# EAGLE board ControlParqueadero (EAGLE 5.07)

Size 160 x 100 mm. Coordinates in mm from the lower left corner, seen from the top.
Outline: 0,0 160,0 160,100 0,100 0,0
Copper layers (1*16): Top 0.035mm / dielectric 1.5mm / Bottom 0.035mm
Design rules "default": minimum track width 10mil, minimum drill 24mil, track to track 8mil, track to pad 8mil, pad to pad 8mil, via to via 8mil, smd to smd 8mil, copper to edge 40mil, drill to drill 8mil, minimum pad ring 10mil, minimum via ring 8mil, stop-mask expansion 4mil, vias tented up to drill 0mil, thermal gap 10mil

## Footprints (pad centres in the part's own frame; a part is rotated, then mirrored left to right if it is on the bottom)
C025-025X050 = drill 0.813 octagon: 1 -1.27,0; 2 1.27,0
TUXGR_16X2_R2 = drill 1 pad 1.676 round: 1 -32,15.5; 2 -29.46,15.5; 3 -26.92,15.5; 4 -24.38,15.5; 5 -21.84,15.5; 6 -19.3,15.5; 7 -16.76,15.5; 8 -14.22,15.5; 9 -11.68,15.5; 10 -9.14,15.5; 11 -6.6,15.5; 12 -4.06,15.5; 13 -1.52,15.5; 14 1.02,15.5; 15 3.56,15.5; 16 6.1,15.5 | hole 2.5: -37.5,-15.5; 37.5,-15.5; -37.5,15.5; 37.5,15.5
B2430UNI = drill 1.118 pad 2.54 octagon: + 3.81,14.605; +@1 -3.81,14.605; +@2 -5.08,12.065; +@3 5.08,12.065; - 0,-5.715; -@1 0,-8.255 | drill 1.803 pad 3.81 octagon: +@4 0,12.065
DIL28-3 = drill 0.813 long: 1 -16.51,-3.81; 2 -13.97,-3.81; 3 -11.43,-3.81; 4 -8.89,-3.81; 5 -6.35,-3.81; 6 -3.81,-3.81; 7 -1.27,-3.81; 8 1.27,-3.81; 9 3.81,-3.81; 10 6.35,-3.81; 11 8.89,-3.81; 12 11.43,-3.81; 13 13.97,-3.81; 14 16.51,-3.81; 15 16.51,3.81; 16 13.97,3.81; 17 11.43,3.81; 18 8.89,3.81; 19 6.35,3.81; 20 3.81,3.81; 21 1.27,3.81; 22 -1.27,3.81; 23 -3.81,3.81; 24 -6.35,3.81; 25 -8.89,3.81; 26 -11.43,3.81; 27 -13.97,3.81; 28 -16.51,3.81
DIL40 = drill 0.813 long: 1 -24.13,-7.62; 2 -21.59,-7.62; 3 -19.05,-7.62; 4 -16.51,-7.62; 5 -13.97,-7.62; 6 -11.43,-7.62; 7 -8.89,-7.62; 8 -6.35,-7.62; 9 -3.81,-7.62; 10 -1.27,-7.62; 11 1.27,-7.62; 12 3.81,-7.62; 13 6.35,-7.62; 14 8.89,-7.62; 15 11.43,-7.62; 16 13.97,-7.62; 17 16.51,-7.62; 18 19.05,-7.62; 19 21.59,-7.62; 20 24.13,-7.62; 21 24.13,7.62; 22 21.59,7.62; 23 19.05,7.62; 24 16.51,7.62; 25 13.97,7.62; 26 11.43,7.62; 27 8.89,7.62; 28 6.35,7.62; 29 3.81,7.62; 30 1.27,7.62; 31 -1.27,7.62; 32 -3.81,7.62; 33 -6.35,7.62; 34 -8.89,7.62; 35 -11.43,7.62; 36 -13.97,7.62; 37 -16.51,7.62; 38 -19.05,7.62; 39 -21.59,7.62; 40 -24.13,7.62
DIL08 = drill 0.813 long: 1 -3.81,-3.81; 2 -1.27,-3.81; 3 1.27,-3.81; 4 3.81,-3.81; 5 3.81,3.81; 6 1.27,3.81; 7 -1.27,3.81; 8 -3.81,3.81
AVR-ISP-6 = drill 1.016 square: 1 -2.54,-1.27 | drill 1.016 octagon: 2 -2.54,1.27; 3 0,-1.27; 4 0,1.27; 5 2.54,-1.27; 6 2.54,1.27
1X05 = drill 1.016 long: 1 -5.08,0; 2 -2.54,0; 3 0,0; 4 2.54,0; 5 5.08,0
QS = drill 0.61 long: 1 -2.54,0; 2 2.54,0
0204/7 = drill 0.813 octagon: 1 -3.81,0; 2 3.81,0
B3F-10XX = drill 1.016 long: 1 -3.251,2.261; 2 3.251,2.261; 3 -3.251,-2.261; 4 3.251,-2.261
KEYPAD4X4 = drill 1.016 long: 1 -13.97,1.27; 2 -11.43,1.27; 3 -8.89,1.27; 4 -6.35,1.27; 5 -3.81,1.27; 6 -1.27,1.27; 7 1.27,1.27; 8 3.81,1.27
BU-SMA-H = drill 1.27 round: 1 0,0 | drill 1.778 round: 2 -2.55,2.55; 3 2.55,2.55; 4 2.55,-2.55; 5 -2.55,-2.55

## Placement (x,y rotation side)
C1  [C025-025X050]  -30.48,161.29 0 top  (outside the outline)
C2  [C025-025X050]  -36.83,161.29 0 top  (outside the outline)
DIS1  TUXGR_16X2_R2  [TUXGR_16X2_R2]  21.59,45.72 270 top
G1  B2430UNI  [B2430UNI]  -83.82,-8.89 180 top  (outside the outline)
IC1  ATMEGA48/88/168-PU  [DIL28-3]  55.88,52.07 90 top
IC2  MEGA164P/324P/644P-PU  [DIL40]  43.18,12.7 0 top
IC3  DS1307  [DIL08]  -104.14,-6.35 0 top  (outside the outline)
JP1  AVR-ISP-6  [AVR-ISP-6]  78.74,8.89 90 top
JP2  AVR-ISP-6  [AVR-ISP-6]  53.34,90.17 0 top
JP3  [1X05]  -104.14,149.86 0 top  (outside the outline)
JP4  [1X05]  -20.32,162.56 0 top  (outside the outline)
Q1  [QS]  -106.68,-16.51 0 top  (outside the outline)
R1  1K  [0204/7]  -45.72,161.29 0 top  (outside the outline)
R2  1K  [0204/7]  -55.88,161.29 0 top  (outside the outline)
R3  1K  [0204/7]  -66.04,161.29 0 top  (outside the outline)
R4  1K  [0204/7]  -76.2,161.29 0 top  (outside the outline)
R5  1K  [0204/7]  -86.36,161.29 0 top  (outside the outline)
R6  1K  [0204/7]  -96.52,161.29 0 top  (outside the outline)
S1  [B3F-10XX]  40.64,91.44 0 top
S2  [B3F-10XX]  69.85,88.9 0 top
U$1  [KEYPAD4X4]  105.41,44.45 270 top
X1  BU-SMA-H  [BU-SMA-H]  5.08,95.25 90 top

## Library data of the parts
C1 C2 R1-R6 = rcl
DIS1 = display-lcd
G1 = battery
IC1 = atmega8
IC2 JP1 JP2 = avr-6
IC3 = ds1307_pcf8583
JP3 JP4 = pinhead
Q1 = special
S1 S2 = switch-omron
U$1 = keypad4x4_ece
X1 = con-coax

## Nets
+5V: C1.1 C2.1 IC1.7 IC2.10 IC3.8 JP1.2 R1.2 R2.2
AREF: IC2.32
AVCC: IC2.30
GND: C1.2 C2.2 DIS1.1 G1.- IC1.8 IC1.22 IC2.11 IC2.31 IC3.4 JP1.6 R3.1 R4.1 R5.1 R6.1 S1.3 S1.4 S2.3 S2.4 X1.2 X1.3 X1.4 X1.5
N$1: IC1.1 JP2.5 R1.1 S1.1 S1.2
N$2: IC1.2 IC2.16
N$3: IC2.9 R2.1 S2.1 S2.2
N$4: IC2.22 U$1.1
N$5: IC2.23 U$1.2
N$6: IC2.7 JP1.1
N$7: IC2.6 JP1.4
N$8: IC2.8 JP1.3
N$9: IC1.27 IC3.5
N$10: IC2.24 U$1.3
N$11: IC1.28 IC3.6
N$12: IC2.25 U$1.4
N$13: IC2.28 R5.2 U$1.7
N$14: IC1.3 IC2.17
N$15: IC1.6 IC2.18
N$16: IC2.26 R3.2 U$1.5
N$17: IC2.15
N$18: IC2.27 R4.2 U$1.6
N$19: IC3.2 Q1.2
N$20: IC2.29 R6.2 U$1.8
N$21: IC3.1 Q1.1
N$22: G1.+ IC3.3
PORTA1: DIS1.4 IC2.39
PORTA2: DIS1.5 IC2.38
PORTA3: DIS1.6 IC2.37
PORTA4: DIS1.11 IC2.36
PORTA5: DIS1.12 IC2.35
PORTA6: DIS1.13 IC2.34
PORTA7: DIS1.14 IC2.33
PORTB3: IC1.17 JP2.4
PORTB4: IC1.18 JP2.1
PORTB5: IC1.19 JP2.3
VCC: DIS1.2

## Tracks (layer width: path | path; a pad name or v marks a point on that pad's centre or on a via)
+5V  (7 unrouted)
GND  (21 unrouted)
N$1  (4 unrouted)
N$2  (1 unrouted)
N$3  (3 unrouted)
N$4  (1 unrouted)
N$5  (1 unrouted)
N$6  (1 unrouted)
N$7  (1 unrouted)
N$8  (1 unrouted)
N$9  (1 unrouted)
N$10  (1 unrouted)
N$11  (1 unrouted)
N$12  (1 unrouted)
N$13  (2 unrouted)
N$14  (1 unrouted)
N$15  (1 unrouted)
N$16  (2 unrouted)
N$18  (2 unrouted)
N$19  (1 unrouted)
N$20  (2 unrouted)
N$21  (1 unrouted)
N$22  (1 unrouted)
PORTA1  (1 unrouted)
PORTA2  (1 unrouted)
PORTA3  (1 unrouted)
PORTA4  (1 unrouted)
PORTA5  (1 unrouted)
PORTA6  (1 unrouted)
PORTA7  (1 unrouted)
PORTB3  (1 unrouted)
PORTB4  (1 unrouted)
PORTB5  (1 unrouted)